# Altium PCB Breakout_6pin.PcbDoc
Units mm, origin at the board's own origin, x right, y up, seen from the top; angles counter-clockwise.
Board outline 55 x 25 mm, 2 copper layers (Top Layer, Bottom Layer), stack 1.571 mm thick; 7 components, 6 nets, 26 pads, 0 vias.
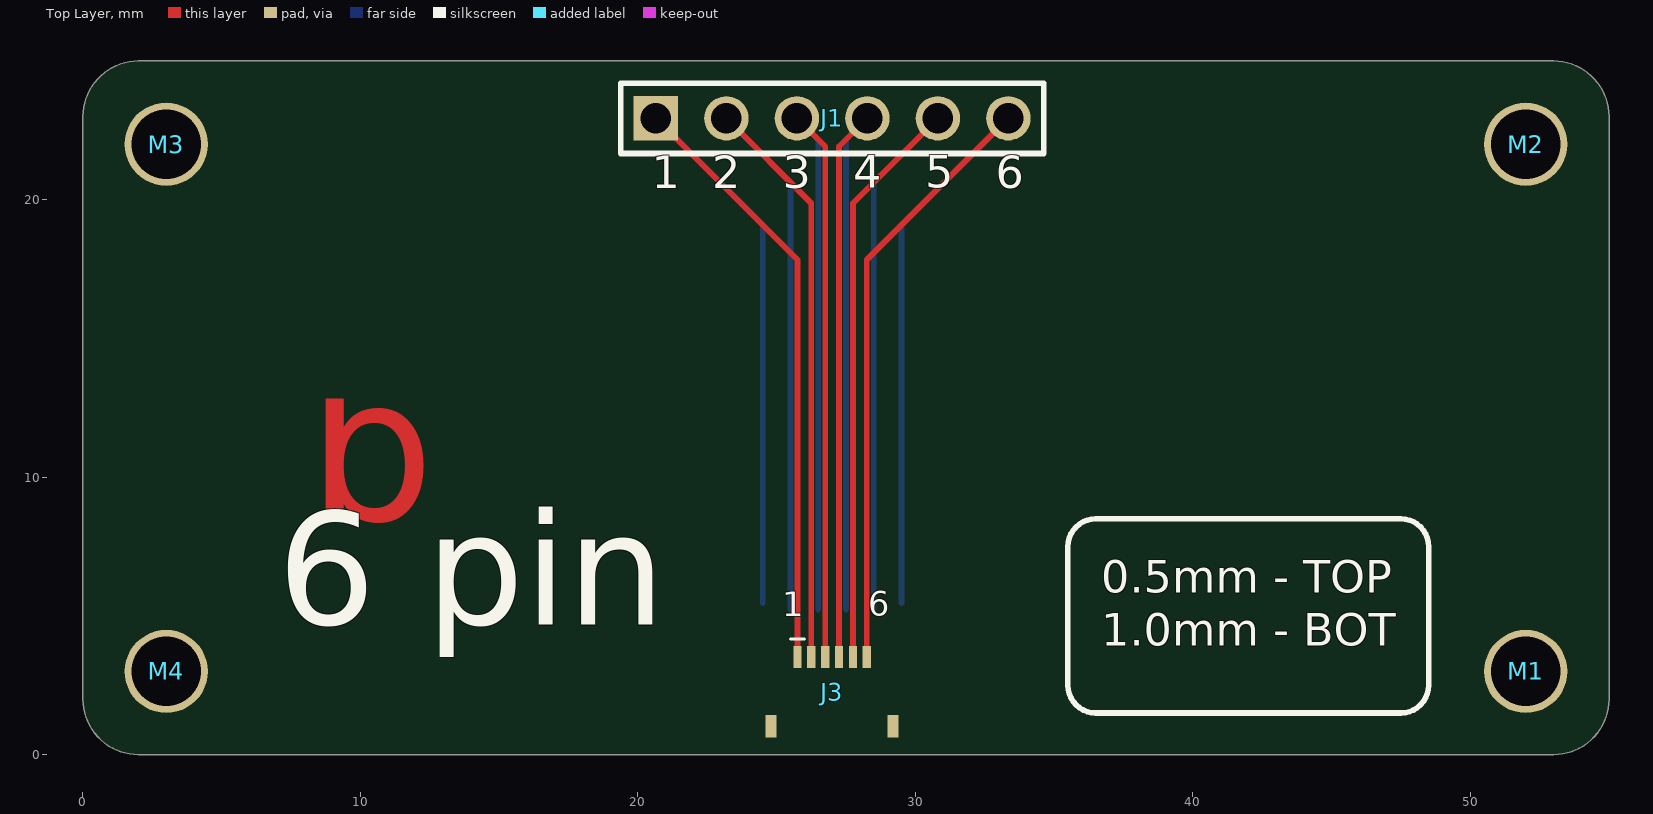
[diagram p0: Top Layer view]
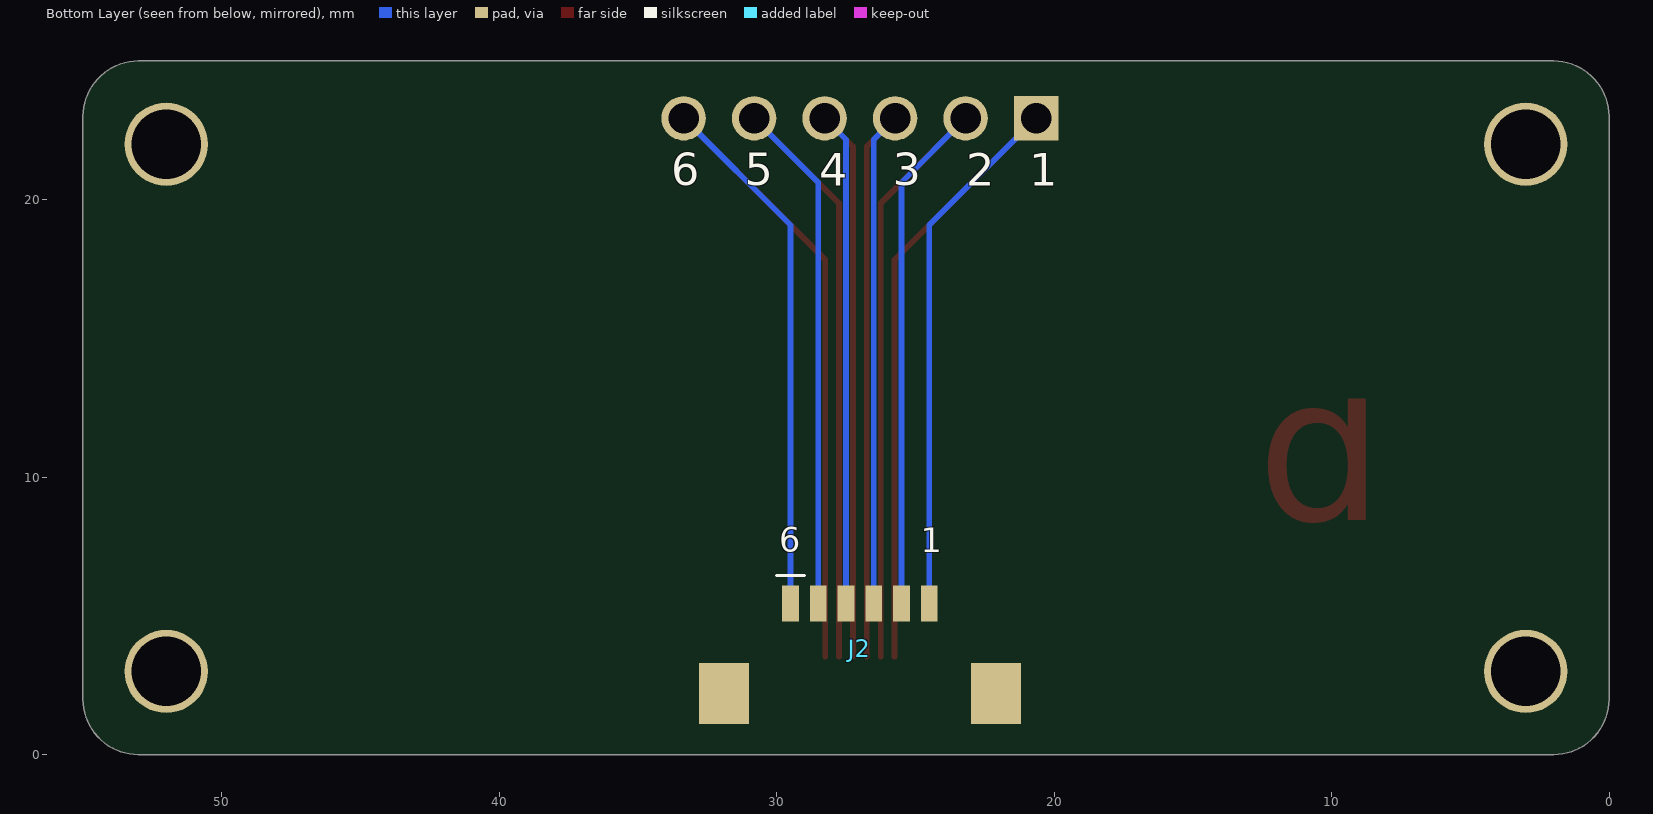
[diagram p1: Bottom Layer view, seen from below]

## Layer stack, top to bottom
Top Solder: solder mask 0.0102, Solder Resist, Dk 3.5
Top Layer: signal copper 0.0356
Dielectric 1: dielectric 1.5, FR-4, Dk 4.8
Bottom Layer: signal copper 0.0356
Bottom Solder: solder mask 0.0102, Solder Resist, Dk 3.5

## Board outline
2,0 cw(c2,2) 0,2 0,23 cw(c2,23) 2,25 53,25 cw(c53,23) 55,23 55,2 cw(c53,2) 53,0

## Design rules (kind name [scope] priority, off if disabled: settings)
Clearance [All] p1: gap=0.204 ignorepadtopadclearanceinfootprint=TRUE
DiffPairsRouting [All] p1: maxlimit=0.254 minlimit=0.064 mostfreqgap=0.127 toplayer_minwidth=0.178 toplayer_maxwidth=0.457 toplayer_prefwidth=0.457 bottomlayer_minwidth=0.178 bottomlayer_maxwidth=0.457 bottomlayer_prefwidth=0.457 impedanceprofiledriven=TRUE maxuncoupledlength=12.7
HoleSize [All] p1: absolutevalues=TRUE maxlimit=5 minlimit=0.153 maxpercent=80.000 minpercent=20.000
MinimumSolderMaskSliver [All] p1: minsoldermaskwidth=0.178
PolygonConnect [All] p1: connectstyle=Relief reliefconductorwidth=0.254 reliefentries=4 polygonreliefangle="90 Angle" airgapwidth=0.254
RoutingVias [All] p1: holewidth=0.305 width=0.61 viastyle="Through Hole" minholewidth=0.254 minwidth=0.508 maxholewidth=0.5 maxwidth=1.27
SolderMaskExpansion [All] p1: expansion=0.102 istentingtop=FALSE
Width [All] p1: maxlimit=25.4 minlimit=0.204 preferedwidth=0.254 minimp=50.000000 maximp=50.000000 favimp=50.000000
27 further rules are at their usual default settings.

## Classes and differential pairs
component class Main: J1 J2 M1 M2 M3 M4

## Components (designator, comment, footprint, x,y, rotation, side; value= is the part's Value field where it differs from the comment)
J1 "61300611121" HDR-V-1X6 27,22.935 r0 top
J2 "XF3M(1)-0615-1B" CONN-FFC-H-6P-1MM 27,3.829 r180 bottom
J3 "FFC2B28-06-G" CONN-FFC-H-6P-0.5MM 27,2.272 r0 top
M1 "MTG_HOLE" MH_P_2.5MM 52,3 r90 top
M2 "MTG_HOLE" MH_P_2.5MM 52,22 r90 top
M3 "MTG_HOLE" MH_P_2.5MM 3,22 r90 top
M4 "MTG_HOLE" MH_P_2.5MM 3,3 r90 top

## Footprints (in the part's own frame and the unit in brackets; to place one, negate y for a bottom-side part, rotate by r counter-clockwise, add the part's x,y. Pads: shape width x height; smd on the part's side, far side on the other; paste and mask are expansions set on the pad)
CONN-FFC-H-6P-0.5MM [mm]
  rect 0.3x0.8 smd: 1(-1.25,1.25) 2(-0.75,1.25) 3(-0.25,1.25) 4(0.25,1.25) 5(0.75,1.25) 6(1.25,1.25)
  rect 0.4x0.8 smd: ME1(-2.2,-1.25) ME2(2.2,-1.25)
  silkscreen extent -1.5,1.9 -1,1.9, body extent -2.5,-1.8 2.5,1.45, height 1.72
CONN-FFC-H-6P-1MM [mm]
  rect 0.6x1.3 smd: 1(-2.5,1.625) 2(-1.5,1.625) 3(-0.5,1.625) 4(0.5,1.625) 5(1.5,1.625) 6(2.5,1.625)
  rect 1.8x2.2 smd: ME1(-4.9,-1.625) ME2(4.9,-1.625)
  silkscreen extent -3,2.63 -2,2.63, body extent -5.3,-3.67 5.3,2.73, height 2
HDR-V-1X6 [mm]
  rect 1.6x1.6 hole 1.1: 1(-6.35,0)
  round 1.6 hole 1.1: 2(-3.81,0) 3(-1.27,0) 4(1.27,0) 5(3.81,0) 6(6.35,0)
  silkscreen extent -7.62,-1.27 7.62,1.27, body extent -7.62,-1.27 7.62,1.27, height 8.55
MH_P_2.5MM [mm]
  round 3 hole 2.5: 1(0,0)

## Part data
J1: library part HDR-V-1X6-M, "Header, 6-Pin, 0.1\"", Color=Black, Current Rating=3A, Manufacturer 1="Wurth Electronics", Max Operating Temperature=125°C, Min Operating Temperature=-40°C, Supplier Part Number 1=732-5319-ND, Voltage Rating=250V, ComponentLink1Description=http://www.mouser.com/ds/2/445/6130xx11121-538006.pdf?src-supplier=Mouser, ComponentLink1URL=http://www.mouser.com/ds/2/445/6130xx11121-538006.pdf?src-supplier=Mouser, ComponentLink2Description=https://katalog.we-online.de/em/datasheet/6130xx11121.pdf?src-supplier=Digi-Key, ComponentLink2URL=https://katalog.we-online.de/em/datasheet/6130xx11121.pdf?src-supplier=Digi-Key, ComponentLink3Description=http://www.farnell.com/cad/1737268.pdf?src-supplier=Element14, ComponentLink3URL=http://www.farnell.com/cad/1737268.pdf?src-supplier=Element14, Connector Type="Male Pin", Contact Gender=Male, Contact Material="Copper Alloy", Contact Mating Length=0.236inch, Contact Plating=Gold, Gender=Male, Housing Material=PBT, Lead Free="Lead Free", Manufacturer Part Number 1=61300611121, Mount="Through Hole", Number of Contacts=6, Number of Positions=6, Number of Rows=1, Packaging=Bulk, Pitch=0.1inch, Pricing 1="1=0.33000, 10=0.27900, 25=0.23200, 50=0.19400, 100=0.17600, 1000=0.16000 (USD)", REACH SVHC=Unknown, RoHS=Yes, Stock 1=13863, Supplier 1=Digi-Key, Termination="Through Hole"
J2: library part CONN-FFC-H-6P-1MM, "1.0-mm Pitch, Dual Contact ; For FPC/FFC, 6 Contacts, RoHS", Actuator Color=Black, Current Rating=500mA, Flammability Rating="UL94 V-0", Housing Color=Natural, Manufacturer 1=Omron, Max Operating Temperature=85°C, Min Operating Temperature=-30°C, Package Quantity=1500, Supplier Part Number=46Y1126, Voltage Rating=50V, Actuator Material="Polymer,Liquid Crystal Polymer", Category="FFC / FPC", ComponentLink1Description=https://datasheet.ciiva.com/48563/en-xf3m-48563813.pdf?src-supplier=Avnet, ComponentLink1URL=https://datasheet.ciiva.com/48563/en-xf3m-48563813.pdf?src-supplier=Avnet, Contact Material="Copper Alloy", Contact Plating=Gold, Housing Material=Polymer, Manufacturer Part Number 1=XF3M(1)-0615-1B, Mating Cycles=20, Mounting Technology="Surface Mount", Number of Positions=6, Number of Rows=1, Orientation="Right Angle", Packaging="Tape and Reel", Pitch=0.039inch, Pricing="1=1.22, 10=1.05, 25=0.991, 50=0.958, 100=0.945, 250=0.915, 500=0.86, 1000=0.765 (USD)", RoHS=Yes, RoHS Compliant=Yes, Series=XF3M, Stock=212, Supplier=Newark, Termination=Solder
J3: library part CONN-FFC-H-6P-0.5MM, "6 Position FFC, FPC Connector Contacts, Top and Bottom 0.020\" (0.50mm) Surface Mount, Right Angle", Manufacturer 1="Global Connector Technology", Manufacturer Part Number 1=FFC2B28-06-G, Number of Positions=6, Pitch=0.5mm
M1 M2 M3 M4: "MTG HOLE PLATED VARIOUS SIZES"

## Nets (pads, with @x,y where several pads share a name; then routed paths per layer and width w, separated by ;. In a path a pad name is that pad's centre, name@x,y a point inside that pad or via, vN(x,y) a via of type N, cw(c..) or ccw(c..) an arc to the next point about the centre after c; other vN are vias at no path point)
NetJ1_1: J1.1 J2.6 J3.1 | length 40.6
  Top Layer w0.204: J1.1 25.75,17.835 J3.1
  Bottom Layer w0.204: J1.1 24.5,19.085 J2.6
NetJ1_2: J1.2 J2.5 J3.2 | length 39.3
  Top Layer w0.204: J1.2 26.25,19.875 J3.2
  Bottom Layer w0.204: J1.2 25.5,20.625 J2.5@25.5,5.229
NetJ1_3: J1.3 J2.4 J3.3 | length 37.9
  Top Layer w0.204: J1.3 26.75,21.915 J3.3
  Bottom Layer w0.204: J1.3 26.5,22.165 J2.4@26.5,5.229
NetJ1_4: J1.4 J2.3 J3.4 | length 37.9
  Top Layer w0.204: J3.4 27.25,21.915 J1.4
  Bottom Layer w0.204: J2.3@27.5,5.229 27.5,22.165 J1.4
NetJ1_5: J1.5 J2.2 J3.5 | length 39.3
  Top Layer w0.204: J3.5 27.75,19.875 J1.5
  Bottom Layer w0.204: J2.2@28.5,5.229 28.5,20.625 J1.5
NetJ1_6: J1.6 J2.1 J3.6 | length 40.6
  Top Layer w0.204: J3.6 28.25,17.835 J1.6
  Bottom Layer w0.204: J2.1 29.5,19.085 J1.6
pads on no net: J2.ME1 J2.ME2 J3.ME1 J3.ME2 M1.1 M2.1 M3.1 M4.1

## Other copper
Top Layer:
  text "b" at 8.1,5.6 h15

## Silkscreen, mask and mechanical layers (free items; w line width, h text height)
Top Overlay:
  lines w0.2: 35.5,2.5 ccw(c36.5,2.5) 36.5,1.5 47.5,1.5 ccw(c47.5,2.5) 48.5,2.5 48.5,7.5 ccw(c47.5,7.5) 47.5,8.5 36.5,8.5 ccw(c36.5,7.5) 35.5,7.5 35.5,2.5 ; 35.5,2.5 35.5,2.5
  text "5" at 30.349,20.042 h2
  text "1" at 20.5,20.021 h2
  text "2" at 22.673,20.021 h2
  text "3" at 25.221,20.021 h2
  text "4" at 27.761,20.026 h2
  text "6" at 32.9,20.021 h2
  text "0.5mm - TOP" at 36.7,5.438 h2
  text "6" at 28.3,4.716 h1.5
  text "1" at 25.2,4.7 h1.5
  text "1.0mm - BOT" at 36.7,3.521 h2
  text "6 pin" at 7,3.347 h7
  text "c" at 3.169,-11.643 h50
Bottom Overlay:
  text "3" at 25.821,20.121 h2
  text "5" at 31.149,20.121 h2
  text "6" at 33.8,20.121 h2
  text "1" at 20.9,20.1 h2
  text "2" at 23.173,20.1 h2
  text "4" at 28.461,20.1 h2
  text "1" at 24.8,7 h1.5
  text "6" at 29.9,7.016 h1.5
Board Outline:
  lines w0.1: 27,25 27.5,25 ; 0,2 ccw(c2,2) 2,0 53,0 ccw(c53,2) 55,2 55,23 ccw(c53,23) 53,25 2,25 ccw(c2,23) 0,23 0,2